# EAGLE board OSO-MISC-21-001 Sensor Watch Express (EAGLE 9.6.2)
REV: D
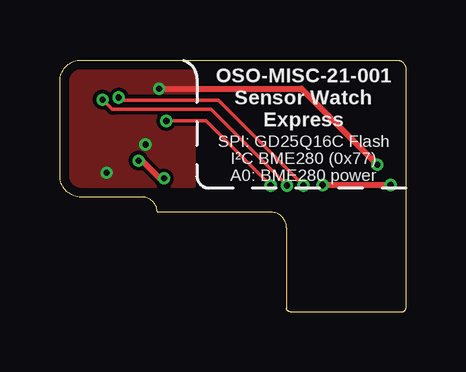
[diagram p0: board, top side]
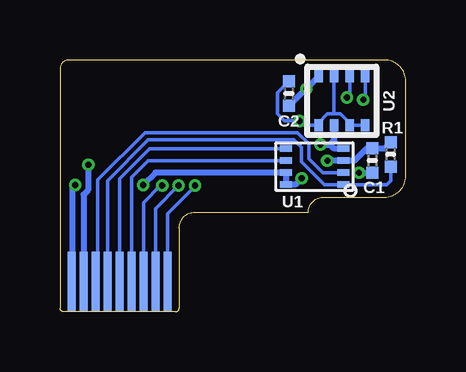
[diagram p1: board, bottom side, seen from below]

Size 14.43 x 10.48 mm. Coordinates in mm from the lower left corner, seen from the top.
Outline: 9.45,3.5 arc90 8.81,4.14 4.06,4.14 arc90 3.43,4.77 0.89,4.77 arc-90 0,5.66 0,9.6 arc-90 0.89,10.48 14.05,10.48 arc-90 14.43,10.1 14.43,3.5
Copper layers (1*16): Top 0.035559375mm / dielectric 4mil / Bottom 0.035559375mm
Design rules "oshpark-2layer *": minimum track width 6mil, minimum drill 10mil, track to track 6mil, track to pad 6mil, pad to pad 6mil, via to via 6mil, smd to smd 6mil, copper to edge 15mil, drill to drill 6mil, minimum pad ring 5mil, minimum via ring 5mil, stop-mask expansion 2.5mil, vias tented up to drill 12mil, thermal gap 10mil
Net classes: 1 power: width 0.254 mm

## Footprints (pad centres in the part's own frame; a part is rotated, then mirrored left to right if it is on the bottom)
_0402MP = smd 0.5 x 0.5: 1 -0.508,0; 2 0.508,0
USON8 = smd 0.5 x 0.275: 1 -1.2,0.75; 2 -1.2,0.25; 3 -1.2,-0.25; 4 -1.2,-0.75; 5 1.2,-0.75; 6 1.2,-0.25; 7 1.2,0.25; 8 1.2,0.75
BME280_LGA = smd 0.5 x 0.35: P$1 1.025,0.975; P$2 1.025,0.325; P$3 1.025,-0.325; P$4 1.025,-0.975; P$5 -1.025,-0.975; P$6 -1.025,-0.325; P$7 -1.025,0.325; P$8 -1.025,0.975
FH19C9S05SH10-FFC = smd 0.347 x 2.5 bottom: 1 2,-2.25; 2 1.5,-2.25; 3 1,-2.25; 4 0.5,-2.25; 5 0,-2.25; 6 -0.5,-2.25; 7 -1,-2.25; 8 -1.5,-2.25; 9 -2,-2.25

## Placement (x,y rotation side)
C1  1uF  [_0402MP]  1.4,6.29 270 bottom
C2  1uF  [_0402MP]  4.88,9.09 270 bottom
R1  10K  [_0402MP]  0.63,6.55 270 bottom
U1  2MB Flash  [USON8]  3.81,6.04 180 bottom
U2  BME280  [BME280_LGA]  2.67,8.78 90 bottom
U$3  FH19C-9S-0.5SH_10-FFC  [FH19C9S05SH10-FFC]  11.94,3.5 0 top

## Library data of the parts
C1 C2 R1 U1 = microbuilder
U2 = BME280ComponentLibrary; PROD_ID: IC-13090
U$3 = FH19C-9S-0.5SH

## Nets
3.3V [power]: C1.1 R1.1 U1.3 U1.7 U1.8 U$3.1
BME_PWR: C2.1 U2.P$2 U2.P$5 U2.P$6 U2.P$8 U$3.9
CS: R1.2 U1.1 U$3.4
GND [power]: C1.2 C2.2 U1.4 U2.P$1 U2.P$7 U$3.2
MISO: U1.2 U$3.3
MOSI: U1.5 U$3.5
SCK: U1.6 U$3.6
SCL: U2.P$4 U$3.8
SDA: U2.P$3 U$3.7

## Tracks (layer width: path | path; a pad name or v marks a point on that pad's centre or on a via)
3.3V  (via drill 0.25)
  Top 0.254: v3.28,6.29 3.43,6.29 4.17,5.56 v4.34,5.56 | v10.96,5.28 v13.79,5.28
  Bottom 0.254: v3.28,6.29 U1.3 2.14,6.29 1.63,6.8 C1.1 0.89,6.8 R1.1 | v4.34,5.56 4.61,5.29 U1.8 U1.7 10.44,5.79 v10.96,5.28 | U$3.1 13.91,1.28 13.91,5.16 v13.79,5.28
BME_PWR  (via drill 0.25)
  Top 0.152: v8.79,5.26 6.1,7.94 v4.44,7.94
  Bottom 0.152: v8.79,5.26 8.79,5.23 9.94,4.09 U$3.9 | C2.1 5.36,9.12 5.36,8.24 5.06,7.94 v4.44,7.94 4.25,7.76 U2.P$8 3.64,7.86 3.26,8.24 3,8.24 | U2.P$2 2.99,8.24 3,8.24 | 3,8.24 2.72,8.24 2.34,7.86 U2.P$6 U2.P$5
CS
  Bottom 0.152: U$3.4 12.44,5.46 10.75,7.16 4.67,7.16 4.35,6.84 4.35,6.25 3.39,5.29 U1.1 0.79,5.29 0.63,5.45 R1.2
GND  (via drill 0.25)
  Top 0.254: v4.14,9.29 10.06,9.29 v13.24,6.12
  Bottom 0.254: U1.4 2.99,6.79 3.17,6.96 | U2.P$7 2.99,7.14 3.17,6.96 | v3.57,6.96 3.17,6.96 | v13.24,6.12 13.25,6.11 13.25,5.06 13.44,4.87 U$3.2 | C2.2 4.17,9.29 v4.14,9.29 3.64,9.79 U2.P$1 | C1.2 v1.95,5.78
  pour Top: 5.59,10.48 0,10.48 0,5.23 5.59,5.23
MISO
  Bottom 0.152: U1.2 3.46,5.79 4.05,6.38 4.05,6.99 4.52,7.46 10.87,7.46 12.84,5.49 12.84,1.34 U$3.3
MOSI
  Bottom 0.152: U1.5 10.68,6.79 11.94,5.53 U$3.5
SCK
  Bottom 0.152: U1.6 10.75,6.29 11.44,5.6 U$3.6
SCL  (via drill 0.25)
  Top 0.152: v9.47,5.26 6.31,8.43 2.19,8.43 v1.78,8.83
  Bottom 0.152: U$3.8 10.44,4.3 v9.48,5.26 v9.47,5.26 | U2.P$4 1.69,8.92 v1.78,8.83
SDA  (via drill 0.25)
  Top 0.152: v10.16,5.26 6.61,8.81 2.57,8.81 v2.45,8.92
  Bottom 0.152: U$3.7 10.94,4.54 10.22,5.26 v10.16,5.26 | U2.P$3 2.34,9.03 v2.45,8.92

## Text on the board
tPlace: OSO-MISC-21-001 / Sensor Watch / Express | SPI: GD25Q16C Flash / I²C BME280 (0x77) / A0: BME280 power
bNames: U1